# Altium PCB Macropadmod.PcbDoc
Units mm, origin at the board's own origin, x right, y up, seen from the top; angles counter-clockwise.
Board outline 58 x 63 mm, 2 copper layers (Top Layer, Bottom Layer); 11 components, 11 nets, 91 pads, 0 vias.
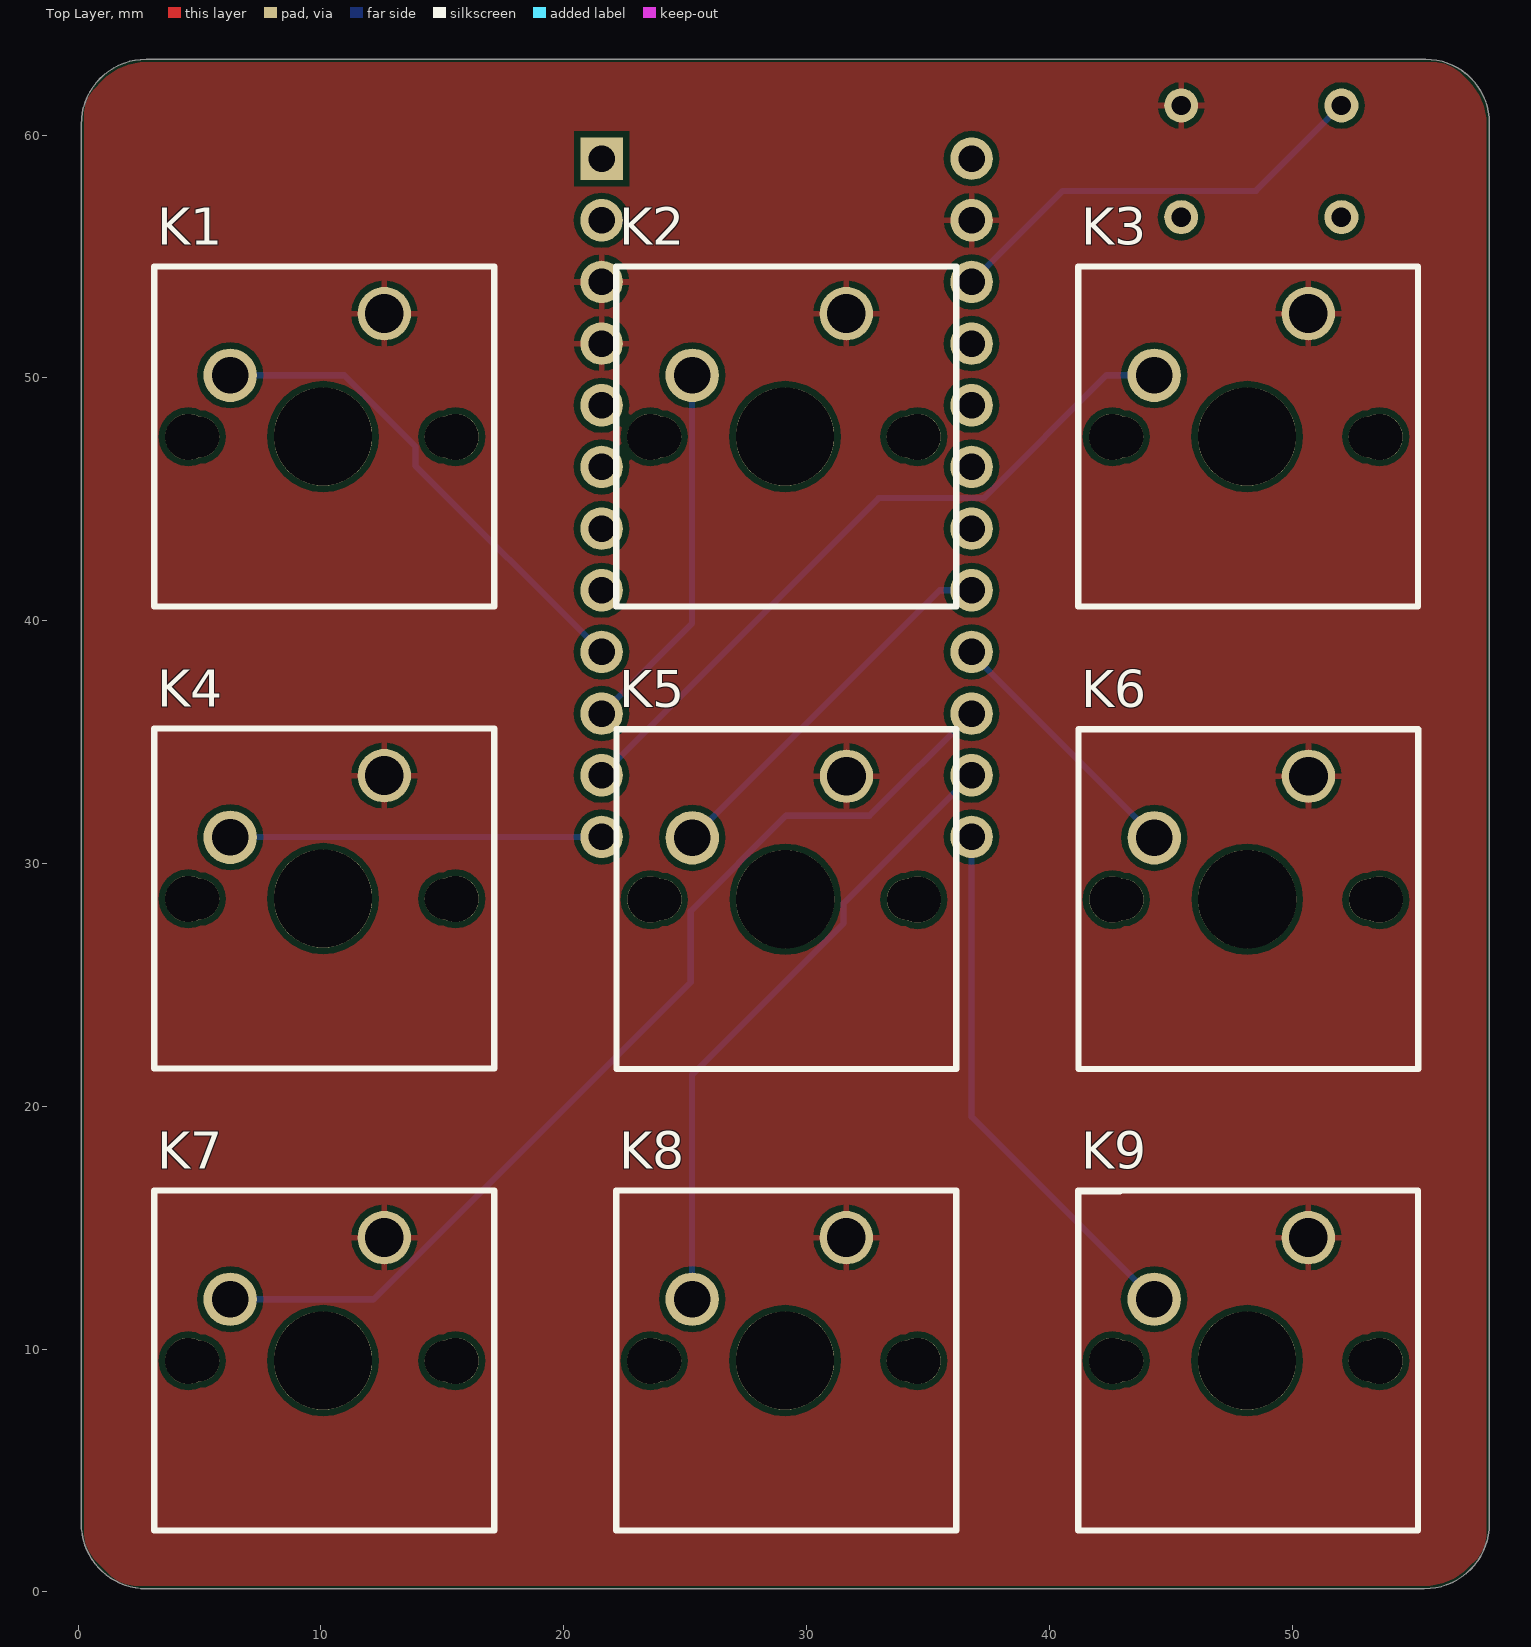
[diagram p0: Top Layer view]
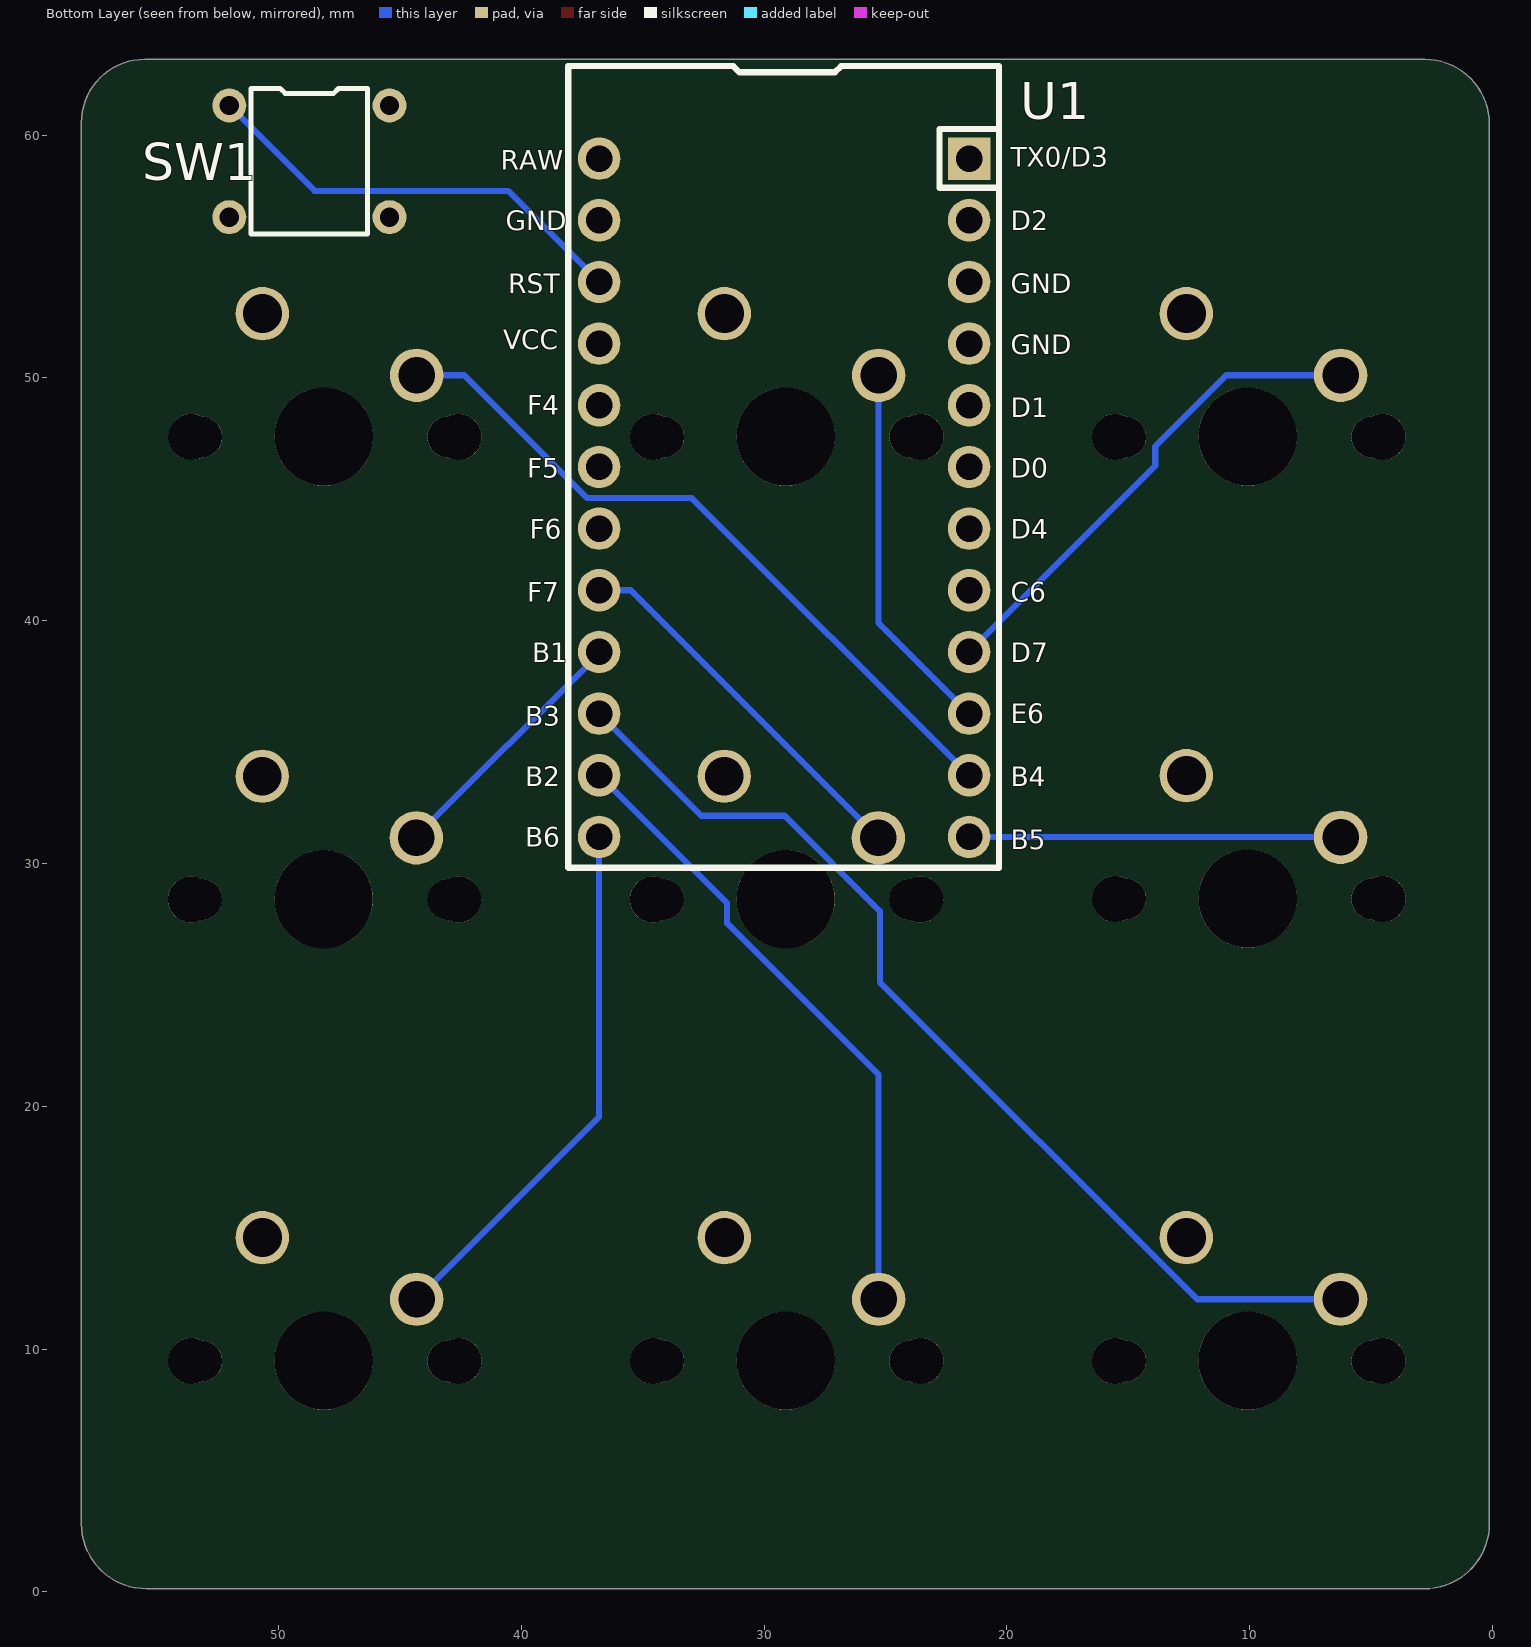
[diagram p1: Bottom Layer view, seen from below]

## Layer stack, top to bottom
Top Solder: solder mask 0.0102, Solder Resist, Dk 3.5
Top Layer: signal copper 0.0356
Dielectric 1: dielectric 0.32, FR-4, Dk 4.8
Bottom Layer: signal copper 0.0356
Bottom Solder: solder mask 0.0102, Solder Resist, Dk 3.5

## Board outline
2.805,0.127 cw(c2.805,2.805) 0.127,2.805 0.127,60.453 cw(c2.801,60.453) 2.801,63.127 55.512,63.127 cw(c55.512,60.512) 58.127,60.512 58.131,60.512 58.131,2.8 58.127,2.801 cw(c55.453,2.801) 55.453,0.127

## Design rules (kind name [scope] priority, off if disabled: settings)
Clearance [All] p1: gap=0.254 ignorepadtopadclearanceinfootprint=FALSE except(0: Arc-Hole Track-Hole SMDPad-Hole THPad-Hole Via-Hole Fill-Hole Poly-Hole Region-Hole Text-Hole)
PolygonConnect [All] p1: connectstyle=Relief reliefconductorwidth=0.254 reliefentries=4 polygonreliefangle="90 Angle" airgapwidth=0.254
RoutingVias [All] p1: holewidth=0.711 width=1.27 viastyle="Through Hole" minholewidth=0.711 minwidth=1.27 maxholewidth=0.711 maxwidth=1.27
SolderMaskExpansion [All] p1: expansion=0.102 istentingtop=FALSE
Width [All] p1: maxlimit=0.254 minlimit=0.254 preferedwidth=0.254
30 further rules are at their usual default settings.

## Components (designator, comment, footprint, x,y, rotation, side; value= is the part's Value field where it differs from the comment)
K1 "KEYSW-canadian_parts" SOCKET 3.085,40.585 r0 top
K2 "KEYSW-canadian_parts" SOCKET 22.115,40.585 r0 top
K3 "KEYSW-canadian_parts" SOCKET 41.145,40.585 r0 top
K4 "KEYSW-canadian_parts" SOCKET 3.085,21.555 r0 top
K5 "KEYSW-canadian_parts" SOCKET 22.121,21.529 r0 top
K6 "KEYSW-canadian_parts" SOCKET 41.151,21.529 r0 top
K7 "KEYSW-canadian_parts" SOCKET 3.085,2.525 r0 top
K8 "KEYSW-canadian_parts" SOCKET 22.115,2.525 r0 top
K9 "KEYSW-canadian_parts" SOCKET 41.145,2.525 r0 top
SW1 "SW_Push" RESET 50.534,55.524 r90 bottom
U1 "ProMicro-keebio" PRO-MICRO 36.801,59.034 r180 bottom

## Footprints (in the part's own frame and the unit in brackets; to place one, negate y for a bottom-side part, rotate by r counter-clockwise, add the part's x,y. Pads: shape width x height; smd on the part's side, far side on the other; paste and mask are expansions set on the pad)
PRO-MICRO [mm]
  rect 1.753x1.753 hole 1.092: 1(15.24,0)
  round 1.753 hole 1.092: 2(15.24,-2.54) 3(15.24,-5.08) 4(15.24,-7.62) 5(15.24,-10.16) 6(15.24,-12.7) 7(15.24,-15.24) 8(15.24,-17.78) 9(15.24,-20.32) 10(15.24,-22.86) 11(15.24,-25.4) 12(15.24,-27.94) 13(0,-27.94) 14(0,-25.4) 15(0,-22.86) 16(0,-20.32) 17(0,-17.78) 18(0,-15.24) 19(0,-12.7) 20(0,-10.16) 21(0,-7.62) 22(0,-5.08) 23(0,-2.54) 24(0,0)
  silkscreen extent -1.27,-29.21 16.48,3.81
RESET [mm]
  round 1.4 hole 0.8: 1(5.7,1.5) 2(5.7,-5.1) 3(1.1,1.5) 4(1.1,-5.1)
  silkscreen extent 0.4,-4.2 6.4,0.6
SOCKET [mm]
  round 2.2 hole 1.5: 1(3.175,9.525)
  round 2.2 hole 1.6: 2(9.525,12.065)
  round 1.9 hole 1.9: 3(1.45,6.985) 3(12.46,6.985)
  round 1.7 hole 1.7: 3(1.88,6.985) 3(12.04,6.985)
  round 4.05 hole 4.05: 3(7,7)
  silkscreen extent 0.05,0 14.05,14

## Nets (pads, with @x,y where several pads share a name; then routed paths per layer and width w, separated by ;. In a path a pad name is that pad's centre, name@x,y a point inside that pad or via, vN(x,y) a via of type N, cw(c..) or ccw(c..) an arc to the next point about the centre after c; other vN are vias at no path point)
GND: K1.2 K2.2 K3.2 K4.2 K5.2 K6.2 K7.2 K8.2 K9.2 SW1.2 U1.3 U1.4 U1.23
NetK1_1: K1.1 U1.9 | length 20.5
  Bottom Layer w0.254: K1.1 10.963,50.11 13.894,47.179 13.894,46.381 U1.9
NetK2_1: K2.1 U1.10 | length 15.5
  Bottom Layer w0.254: U1.10 25.29,39.903 K2.1
NetK3_1: K3.1 U1.11 | length 29.6
  Bottom Layer w0.254: U1.11 32.978,45.052 37.297,45.052 42.355,50.11 K3.1
NetK4_1: K4.1 U1.12 | length 15.3
  Bottom Layer w0.254: K4.1 6.267,31.087 21.554,31.087 U1.12
NetK5_1: K5.1 U1.17 | length 15.7
  Bottom Layer w0.254: K5.1 35.496,41.254 U1.17
NetK6_1: K6.1 U1.16 | length 10.8
  Bottom Layer w0.254: U1.16 36.801,38.647 44.326,31.121 K6.1
NetK7_1: K7.1 U1.15 | length 42.2
  Bottom Layer w0.254: K7.1 12.164,12.05 25.232,25.118 25.232,28.043 29.154,31.965 32.592,31.965 U1.15
NetK8_1: K8.1 U1.14 | length 26.4
  Bottom Layer w0.254: K8.1 25.29,21.295 31.527,27.532 31.527,28.36 U1.14
NetK9_1: K9.1 U1.13 | length 22.2
  Bottom Layer w0.254: U1.13 36.801,19.569 K9.1
NetSW1_1: SW1.1 U1.22 | length 18.2
  Bottom Layer w0.254: U1.22 40.552,57.705 48.515,57.705 SW1.1
pads on no net: K1.3 K2.3 K3.3 K4.3 K5.3 K6.3 K7.3 K8.3 K9.3 SW1.3 SW1.4 U1.1 U1.2 U1.5 U1.6 U1.7 U1.8 U1.18 U1.19 U1.20 U1.21 U1.24

## Polygon pours and split planes (outlines as drawn)
GND on Top Layer "GND_L01_P010" (solid, pour order 10): 2.802,63 ccw(c2.802,60.46) 1.006,62.256 0.75,62 ccw(c1.957,60.793) 0.25,60.793 0.25,2.5 ccw(c2.061,2.5) 0.78,1.22 1.25,0.75 ccw(c2.457,1.957) 2.457,0.25 55.448,0.25 ccw(c55.448,2.79) 57.244,0.994 57.5,1.25 ccw(c56.293,2.457) 58,2.457 58,60.448 ccw(c55.46,60.448) 57.256,62.244 57,62.5 ccw(c55.793,61.293) 55.793,63
no net on Top Layer "NONET_L01_P012" (solid, pour order 12): 50.5,66.5
no net on Top Layer "NONET_L01_P007" (solid, pour order 7): 16.5,69.5

## Other copper
Top Layer:
  region: 146.878,207.896

## Silkscreen, mask and mechanical layers (free items; w line width, h text height)
Top Overlay:
  lines w0.254: 41.201,15.15 41.201,16.499 42.918,16.499
Mechanical 1:
  lines w0.254: 58.127,2.801 cw(c55.453,2.801) 55.453,0.127 2.805,0.127 cw(c2.805,2.805) 0.127,2.805 0.127,60.453 cw(c2.801,60.453) 2.801,63.127 55.512,63.127 cw(c55.512,60.512) 58.127,60.512 ; 58.131,2.8 58.131,60.512

## Text inside footprints (layer, text, board x,y; h text height)
U1: Bottom Overlay "F6" at 39.651,43.384 h0.8; Bottom Overlay "GND" at 19.851,53.484 h0.8; Bottom Overlay "RAW" at 40.851,58.584 h0.8; Bottom Overlay "GND" at 40.651,56.084 h0.8; Bottom Overlay "RST" at 40.551,53.484 h0.8; Bottom Overlay "VCC" at 40.751,51.184 h0.8; Bottom Overlay "F4" at 39.751,48.484 h0.8; Bottom Overlay "F5" at 39.751,45.884 h0.8; Bottom Overlay "F7" at 39.751,40.784 h0.8; Bottom Overlay "B1" at 39.551,38.284 h0.8; Bottom Overlay "B3" at 39.851,35.684 h0.8; Bottom Overlay "B2" at 39.851,33.184 h0.8; Bottom Overlay "B6" at 39.851,30.684 h0.8; Bottom Overlay "D2" at 19.851,56.084 h0.8; Bottom Overlay "GND" at 19.851,50.984 h0.8; Bottom Overlay "D1" at 19.851,48.384 h0.8; Bottom Overlay "D0" at 19.851,45.884 h0.8; Bottom Overlay "D4" at 19.851,43.384 h0.8; Bottom Overlay "C6" at 19.851,40.784 h0.8; Bottom Overlay "D7" at 19.851,38.284 h0.8; Bottom Overlay "TX0/D3" at 19.851,58.698 h0.8; Bottom Overlay "E6" at 19.851,35.784 h0.8; Bottom Overlay "B4" at 19.851,33.184 h0.8; Bottom Overlay "B5" at 19.851,30.584 h0.8